# Altium PCB HumiditySensorBreakOut.PcbDoc
Units mm, origin at the board's own origin, x right, y up, seen from the top; angles counter-clockwise.
Board outline 13.97 x 13.21 mm, 2 copper layers (Top Layer, Bottom Layer); 3 components, 5 nets, 15 pads, 0 vias.
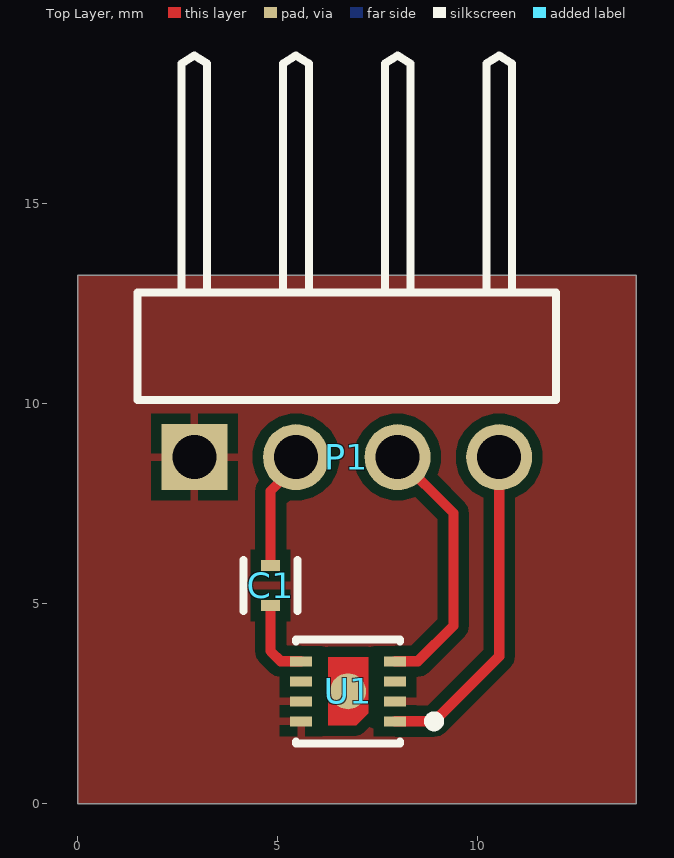
[diagram p0: Top Layer view]
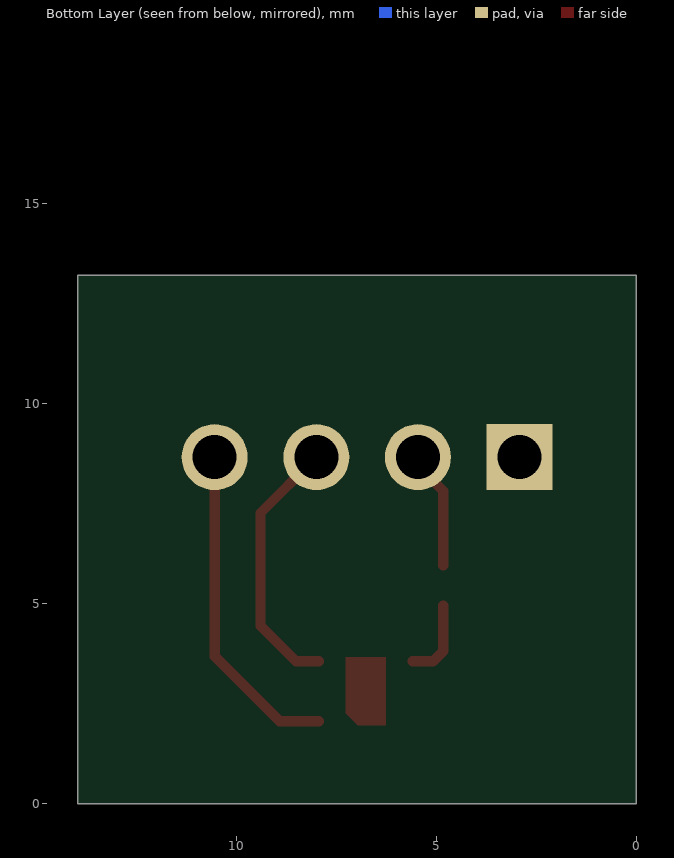
[diagram p1: Bottom Layer view, seen from below]

## Layer stack, top to bottom
Top Solder: solder mask 0.0102, Solder Resist, Dk 3.5
Top Layer: signal copper 0.0356
Dielectric 1: dielectric 0.32, FR-4, Dk 4.8
Bottom Layer: signal copper 0.0356
Bottom Solder: solder mask 0.0102, Solder Resist, Dk 3.5

## Board outline
0,0 13.97,0 13.97,13.208 0,13.208

## Design rules (kind name [scope] priority, off if disabled: settings)
Clearance [All] p1: gap=0.254 ignorepadtopadclearanceinfootprint=TRUE except(0: Arc-Hole Track-Hole SMDPad-Hole THPad-Hole Via-Hole Fill-Hole Poly-Hole Region-Hole Text-Hole; 0.127: Arc-SMDPad Track-SMDPad)
PolygonConnect [All] p1: connectstyle=Relief reliefconductorwidth=0.2 reliefentries=4 polygonreliefangle="90 Angle" airgapwidth=0.254
RoutingVias [All] p1: holewidth=0.711 width=1.27 viastyle="Through Hole" minholewidth=0.711 minwidth=1.27 maxholewidth=0.711 maxwidth=1.27
SilkToSolderMaskClearance [IsPad] p1 off: minsilkscreentomaskgap=0.254 clearancetoexposedcopper=TRUE
SolderMaskExpansion [All] p1: expansion=0.102 istentingtop=FALSE
Width [All] p1: maxlimit=0.254 minlimit=0.254 preferedwidth=0.254
29 further rules are at their usual default settings.

## Components (designator, comment, footprint, x,y, rotation, side; value= is the part's Value field where it differs from the comment)
C1 "CGA2B1X7R1C104K050BC" FP-CGA2B-IPC_C 4.826,5.453 r270 top
P1 "61300411021" 61300411021 6.731,11.43 r180 top
U1 "SHT35-DIS-B2.5KS" FP-SHT35-DIS-B2_5KS-MFG 6.763,2.806 r180 top

## Footprints (in the part's own frame and the unit in brackets; to place one, negate y for a bottom-side part, rotate by r counter-clockwise, add the part's x,y. Pads: shape width x height; smd on the part's side, far side on the other; paste and mask are expansions set on the pad)
61300411021 [mm] "Pin Header, pitch 2.54 mm, THT, Angled, single row, 4p"
  rect 1.65x1.65 hole 1.1: 1(3.81,2.77)
  round 1.65 hole 1.1: 2(1.27,2.77) 3(-1.27,2.77) 4(-3.81,2.77)
  silkscreen extent -5.23,-7.27 5.23,1.35, body extent -5.08,-7.27 5.08,3.09, height 2.58
FP-CGA2B-IPC_C [mm]
  rect 0.272x0.472 smd paste+0 mask+0: 1(-0.5,0) 2(0.5,0)
  silkscreen extent -0.64,-0.67 0.64,0.67, body extent -0.74,-0.38 0.74,0.38, height 0.25
FP-SHT35-DIS-B2_5KS-MFG [mm]
  rect 0.55x0.25 smd paste-1000 mask-1000: 1(-1.175,0.75) 2(-1.175,0.25) 3(-1.175,-0.25) 4(-1.175,-0.75) 5(1.175,-0.75) 6(1.175,-0.25) 7(1.175,0.25) 8(1.175,0.75)
  round 0.9 smd paste-1000 mask+0: 9(0,0)
  Top Layer region: -0.5,-0.85 0.5,-0.85 0.5,0.85 -0.2,0.85 -0.5,0.55 -0.5,-0.85
  silkscreen extent -2.28,-1.3 1.3,1.3, body extent -1.65,-1.4 1.65,1.4, height 0.25

## Part data
C1: library part CMP-08246-004730-1, "Cap Ceramic 100nF 16V X7R 10% Pad SMD 0402 +125°C Automotive T/R", Capacitance=100nF, Case Code (Imperial)=0402, Case Code (Metric)=1005, Dielectric=X7R, Max Operating Temperature=125°C, Min Operating Temperature=-55°C, Package Quantity=1, Ratings=AEC-Q200, Resistor Type=Ceramic, Tolerance=10%, Voltage Rating=16V, Case/Package=0402, Depth=0.5mm, Height=0.5mm, Lead Free="Lead Free", Length=1mm, Mount="Surface Mount", Packaging="Tape and Reel", REACH SVHC="No SVHC", RoHS Compliant=Yes, Series=CGA, Termination=SMD/SMT, Thickness=0.022inch, Voltage Rating (DC)=16V, Weight=2.3E-05oz, Width=0.5mm
P1: library part CMP-1502-01063-1, "THT Angled Pin Header WR-PHD, Pitch 2.54 mm, Single Row, 4 pins", Contact Resistance=20mOhm, Manufacturer="Wurth Elektronik", Operating Temperature=-40to105degC, Rated Current=3A, Withstanding Voltage=500VAC, Working Voltage=250VAC, Datasheet URL=https://katalog.we-online.de/em/datasheet/6130xx11021.pdf, Gender=Male, Manufacturer URL=http://www.we-online.de, Mounting Technology=THT, Orientation=Angled, Package Reference=61300411021, Packaging=Bag, Part Number=61300411021, Pin Number=4, Pitch=2.54mm, Publisher=WurthElektronik, Row Number=Single
U1: library part CMP-144040-000010-1, "SENSOR HUMI/TEMP 5V I2C 1.5% SMD", RoHS Compliant=Yes

## Nets (pads, with @x,y where several pads share a name; then routed paths per layer and width w, separated by ;. In a path a pad name is that pad's centre, name@x,y a point inside that pad or via, vN(x,y) a via of type N, cw(c..) or ccw(c..) an arc to the next point about the centre after c; other vN are vias at no path point)
3V3: C1.1 P1.2 | length 3
  Top Layer w0.254: C1.1 4.826,7.813 5.461,8.448 P1.2
GND: P1.1 U1.2 U1.7 U1.8
NetC1_2: C1.2 U1.5 | length 2
  Top Layer w0.254: C1.2 4.826,3.81 5.08,3.556 U1.5
SCL: P1.3 U1.4 | length 6.6
  Top Layer w0.254: U1.4 8.509,3.556 9.398,4.445 9.398,7.263 P1.3
SDA: P1.4 U1.1 | length 8.3
  Top Layer w0.254: U1.1 8.914,2.056 10.541,3.683 P1.4
pads on no net: U1.3 U1.6 U1.9

## Polygon pours and split planes (outlines as drawn)
GND on Top Layer "GND_L01_P000" (solid, pour order 0): 0,13.208 13.97,13.208 13.97,0 0,0